# Altium PCB PCB1.PcbDoc
Units mm, origin at the board's own origin, x right, y up, seen from the top; angles counter-clockwise.
Board outline 40.01 x 73.03 mm, 4 copper layers (Top Layer, Layer 1, Layer 2, Bottom Layer), stack 0.603 mm thick; 35 components, 39 nets, 229 pads, 54 vias.
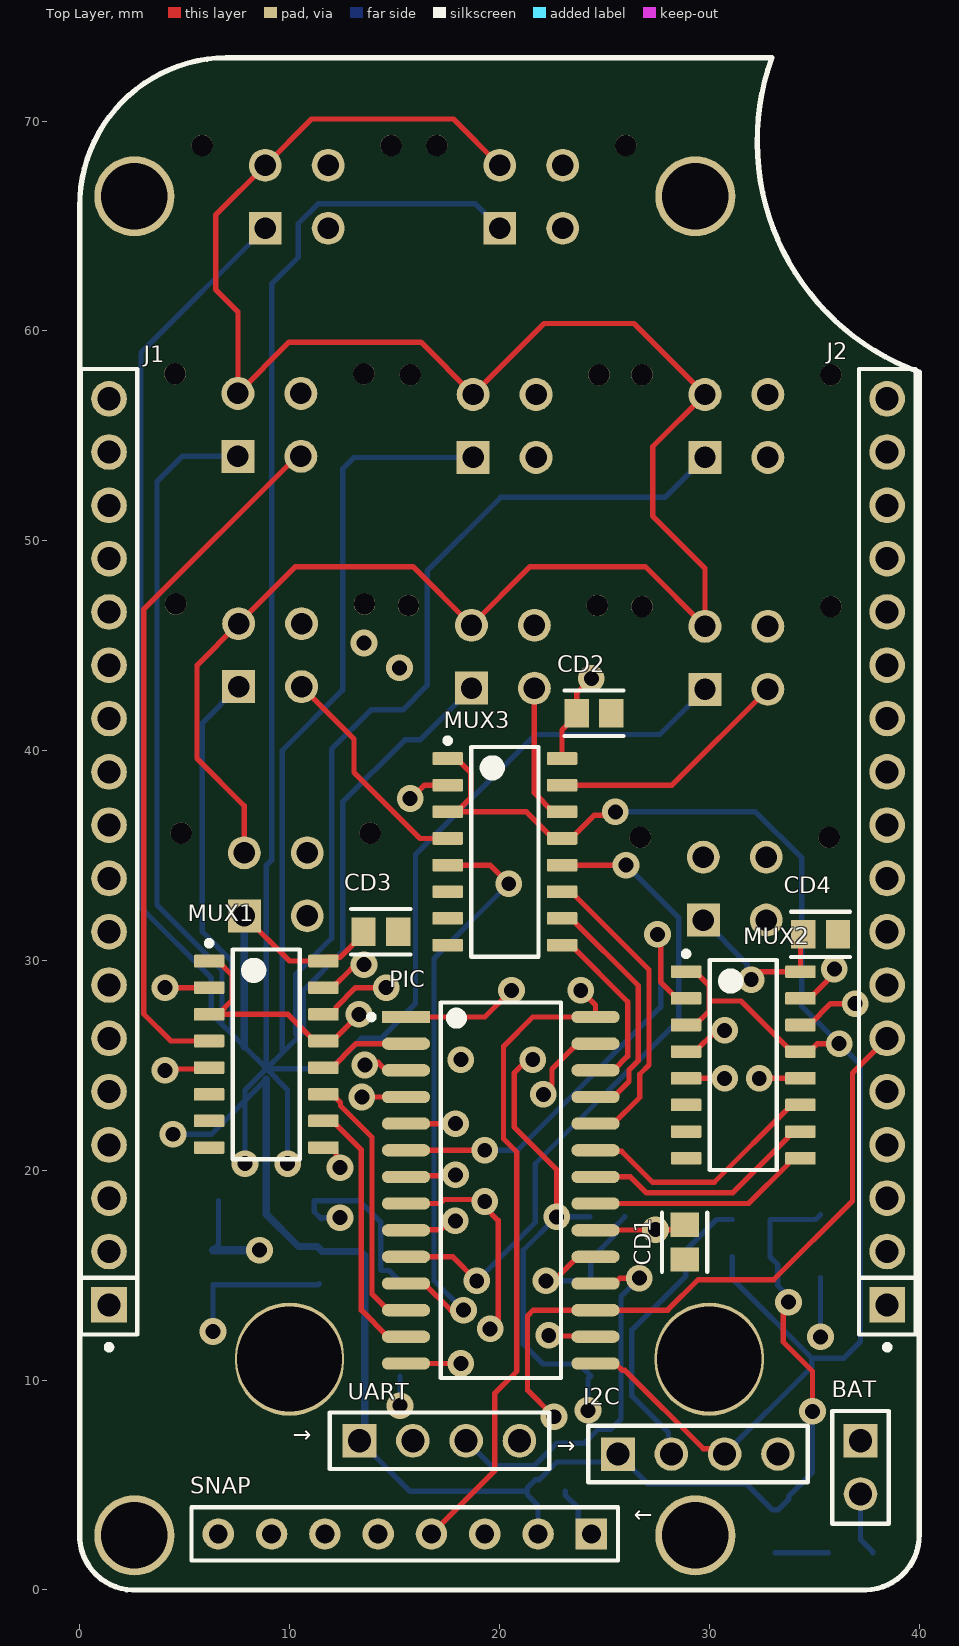
[diagram p0: Top Layer view]
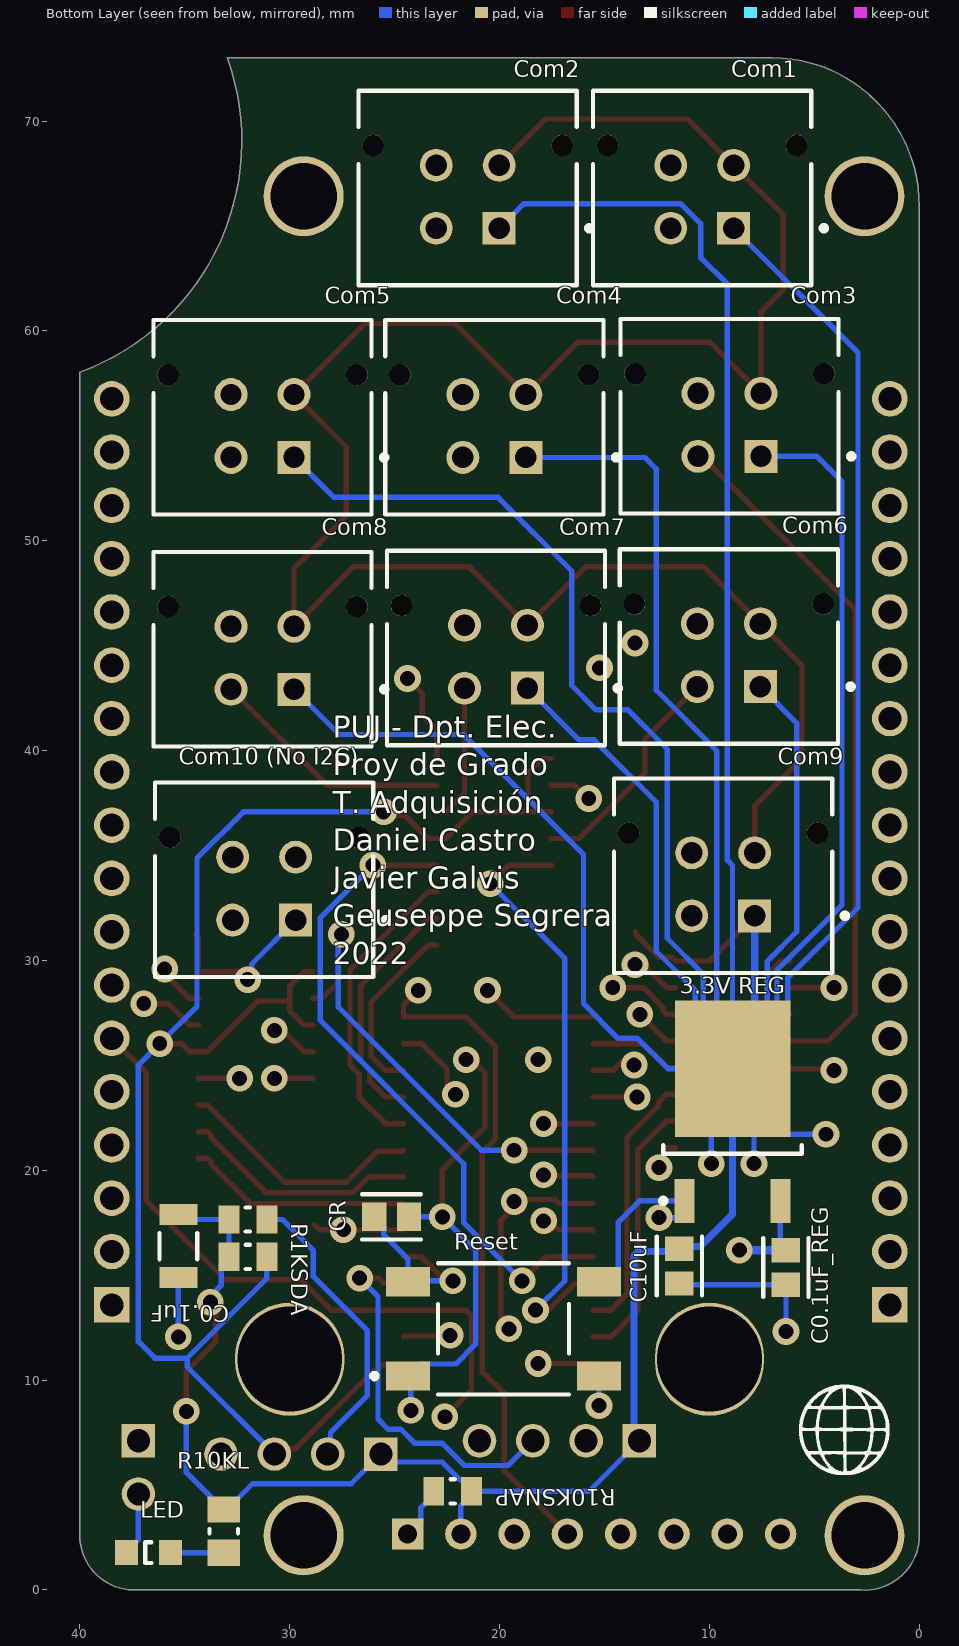
[diagram p1: Bottom Layer view, seen from below]
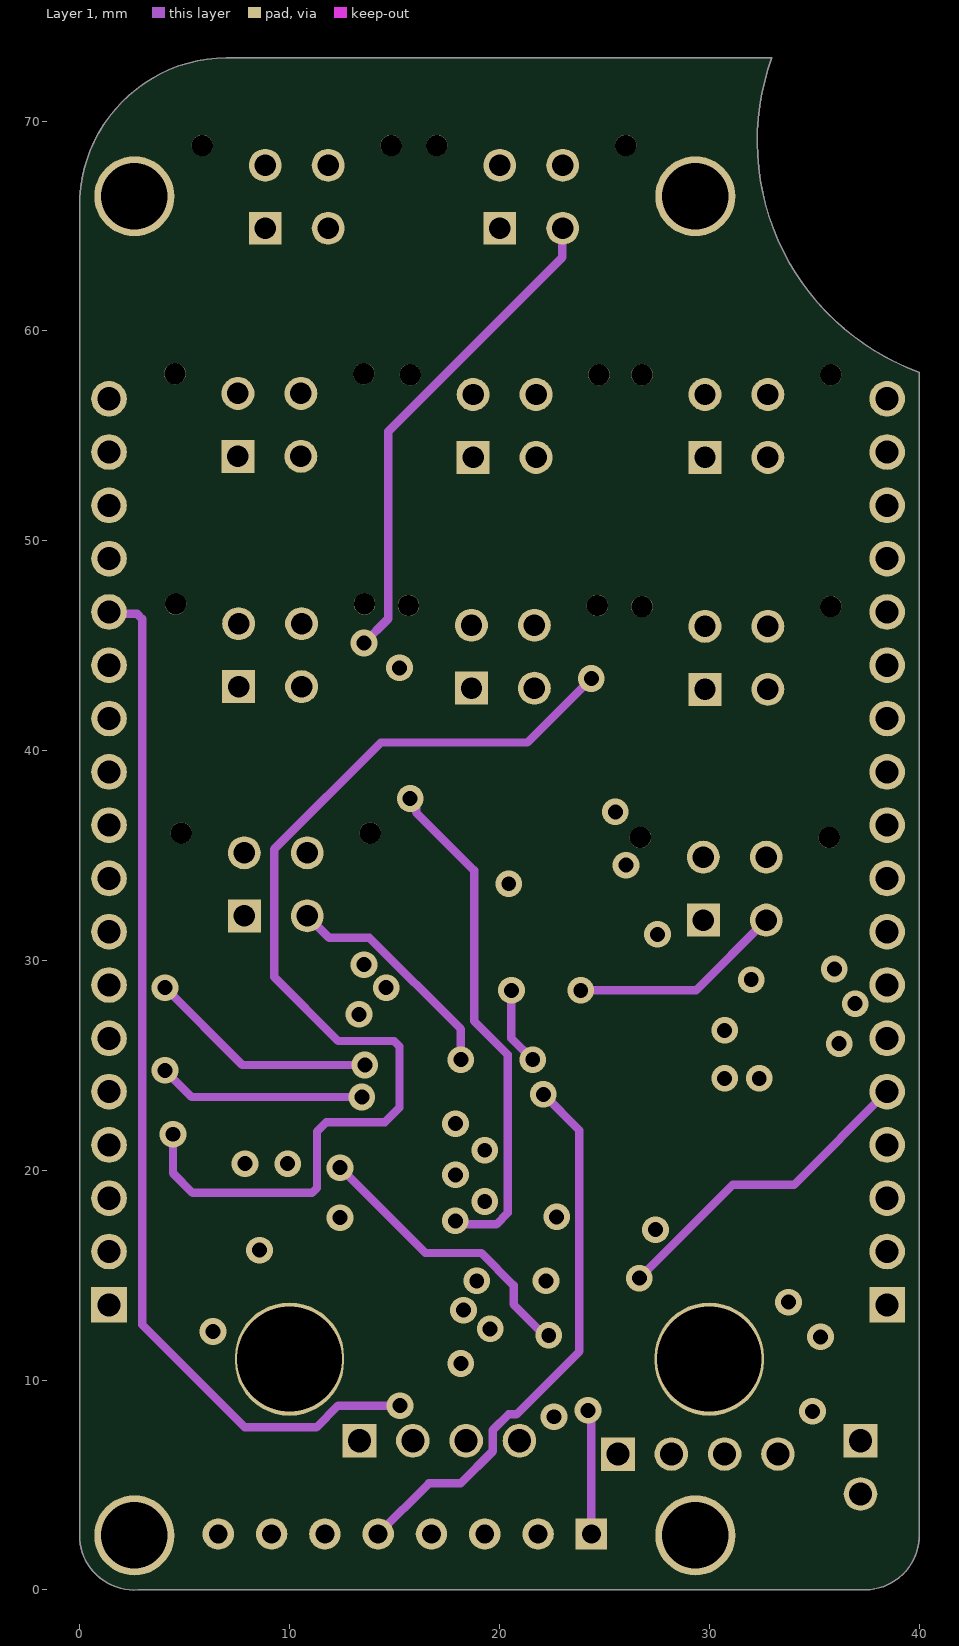
[diagram p2: Layer 1]
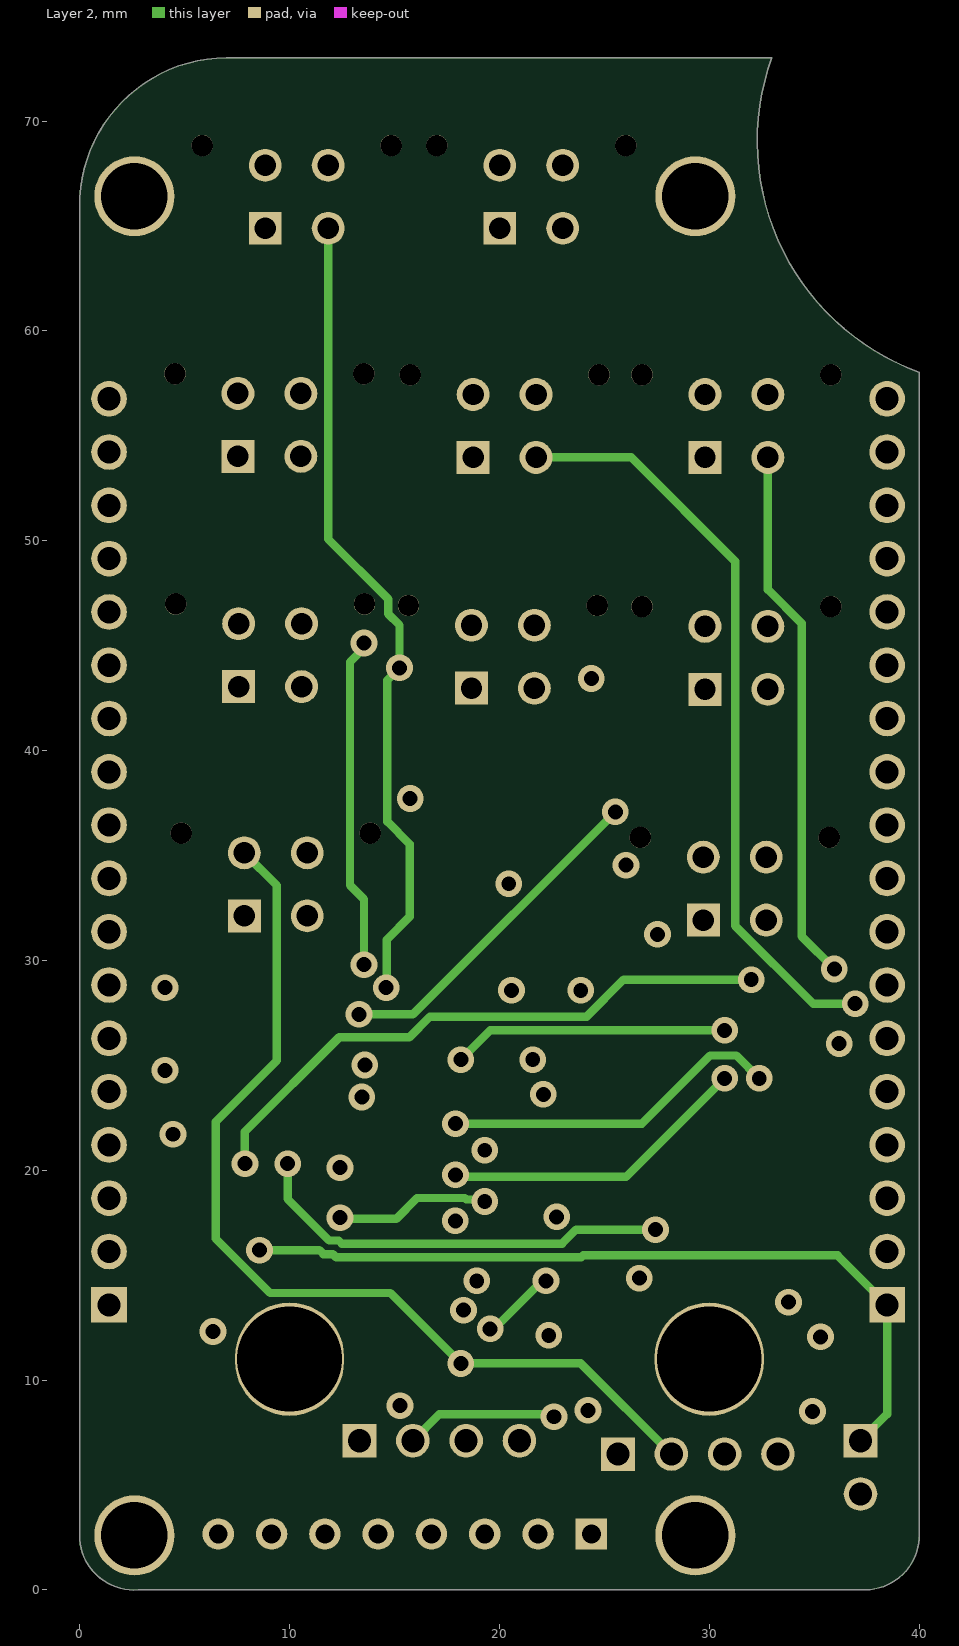
[diagram p3: Layer 2]
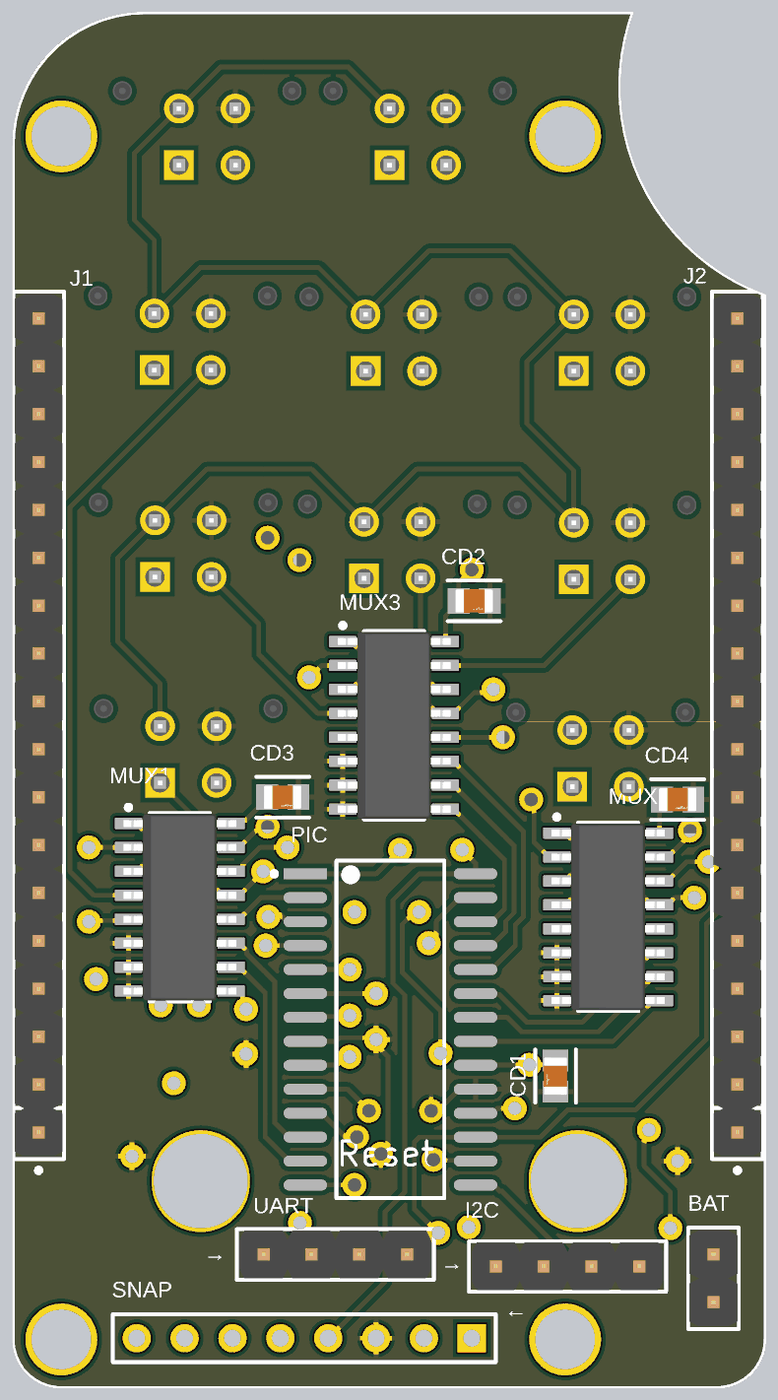
[diagram p4: 3D render of the assembled board from above, using the file's embedded part models]
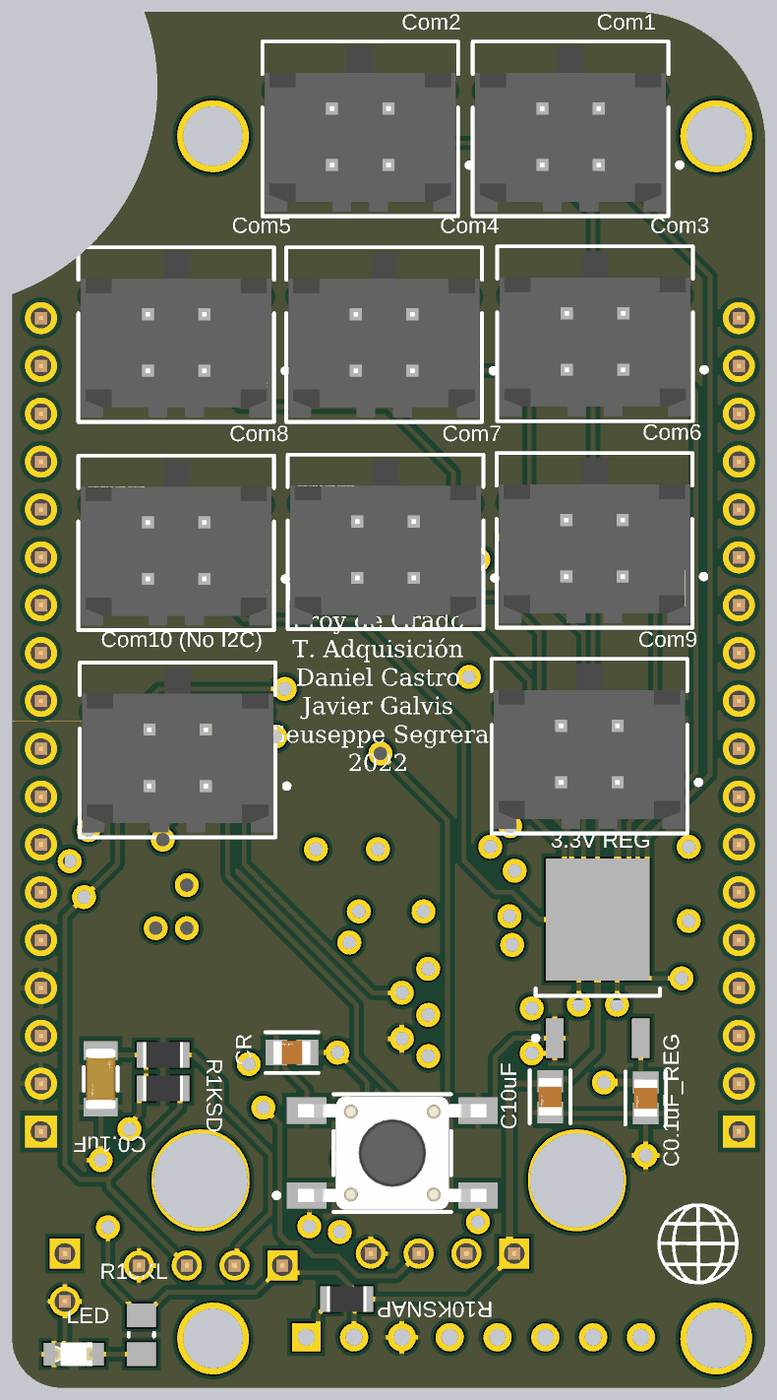
[diagram p5: 3D render of the assembled board from below, using the file's embedded part models]

## Layer stack, top to bottom
Top Solder: solder mask 0.0102, Solder Resist, Dk 3.5
Top Layer: signal copper 0.0356
Dielectric 2: prepreg 0.0711, PP-006, Dk 4.1
Layer 1: signal copper 0.035
Dielectric 1: dielectric 0.32, FR-4, Dk 4.8
Layer 2: signal copper 0.035
Dielectric 3: prepreg 0.0711, PP-006, Dk 4.1
Bottom Layer: signal copper 0.0356
Bottom Solder: solder mask 0.0102, Solder Resist, Dk 3.5

## Board outline
0,2.413 0,65.913 cw(c7.048,65.977) 6.985,73.025 32.985,73.025 ccw(c43.988,69.042) 40.005,58.039 40.005,2.667 cw(c37.401,2.603) 37.465,0 2.794,0 cw(c2.603,2.603)

## Design rules (kind name [scope] priority, off if disabled: settings)
Clearance [All] p1: gap=0.254 ignorepadtopadclearanceinfootprint=FALSE
PolygonConnect [All] p1: connectstyle=Relief reliefconductorwidth=0.254 reliefentries=4 polygonreliefangle="90 Angle" airgapwidth=0.254
RoutingVias [All] p1: holewidth=0.711 width=1.27 viastyle="Through Hole" minholewidth=0.711 minwidth=1.27 maxholewidth=0.711 maxwidth=1.27
SolderMaskExpansion [All] p1: expansion=0.102 istentingtop=FALSE
Width [All] p1: maxlimit=0.5 minlimit=0.254 preferedwidth=0.4 toplayer_maxwidth=0.4 toplayer_prefwidth=0.254 bottomlayer_maxwidth=0.4 bottomlayer_prefwidth=0.254 minimp=50.000000 maximp=50.000000 favimp=50.000000
30 further rules are at their usual default settings.

## Components (designator, comment, footprint, x,y, rotation, side; value= is the part's Value field where it differs from the comment)
"3.3V REG" "LD1117DT33TR" TO-252_N 8.896,22.792 r90 bottom
BAT "Sigma" 61300211121 37.211,5.842 r270 top
C0.1uF "Sigma 1206" FP-CC1206-1_25-MFG 35.306,16.383 r270 bottom value="100 nF"
C0.1uF_REG "Sigma 0805" FP-GRM216-0_1-IPC_B 6.35,15.367 r270 bottom
C10uF "Sigma 0805" FP-GRM216-0_1-IPC_B 11.43,15.432 r270 bottom
CD1 "Sigma 0805" FP-GRM216-0_1-IPC_B 28.829,16.572 r270 top
CD2 "Sigma 0805" FP-GRM216-0_1-IPC_B 24.511,41.783 r0 top
CD3 "Sigma 0805" FP-GRM216-0_1-IPC_B 14.351,31.369 r0 top
CD4 "Sigma 0805" FP-GRM216-0_1-IPC_B 35.306,31.242 r0 top
Com1 "" FP-43045-0427-MFG 10.342,66.809 r180 bottom
Com2 "" FP-43045-0427-MFG 21.518,66.809 r180 bottom
Com3 "" FP-43045-0427-MFG 9.041,55.938 r180 bottom
Com4 "" FP-43045-0427-MFG 20.248,55.887 r180 bottom
Com5 "" FP-43045-0427-MFG 31.297,55.887 r180 bottom
Com6 "" FP-43045-0427-MFG 9.072,44.965 r180 bottom
Com7 "" FP-43045-0427-MFG 20.169,44.889 r180 bottom
Com8 "" FP-43045-0427-MFG 31.297,44.838 r180 bottom
Com9 "" FP-43045-0427-MFG 9.343,34.043 r180 bottom
"Com10 (No I2C)" "" FP-43045-0427-MFG 31.218,33.84 r180 bottom
CR "Sigma 0805" FP-GRM216-0_1-IPC_B 25.146,17.78 r0 bottom
I2C "61300411121" 61300411121 29.464,6.477 r0 top
J1 "61301811121" FP-61301811121-MFG 1.397,35.179 r90 top
J2 "61301811121" FP-61301811121-MFG 38.481,35.179 r90 top
LED "LED Blanco Sigma 0805" 0805_A 36.737,1.778 r180 bottom
MUX1 "CD74HC4053M96" D0016A_N 8.89,25.527 r0 top
MUX2 "CD74HC4053M96" D0016A_N 31.623,25.019 r0 top
MUX3 "CD74HC4053M96" D0016A_N 20.262,35.179 r0 top
PIC "PIC18F26K40-I/SO" FP-C04-052-IPC_B 20.066,19.05 r0 top
R1KSDA "Sigma 0805" RESC2013X60X35NL10T20 31.993,15.875 r180 bottom
R10KL "Sigma 0805" RESC2013X50X30ML20T20 33.147,2.803 r270 bottom
R10KSNAP "Sigma 0805" RESC2013X60X35NL10T20 22.236,4.699 r0 bottom
Reset "TL3301AF160QG" FP-TL3301AF160QG-MFG 19.812,12.446 r180 bottom
SNAP "SNAP" HDR1X8 24.384,2.667 r180 top
UART "61300411121" 61300411121 17.145,7.112 r0 top
? "Sigma 0805" RESC2013X60X35NL10T20 31.993,17.653 r180 bottom

## Footprints (in the part's own frame and the unit in brackets; to place one, negate y for a bottom-side part, rotate by r counter-clockwise, add the part's x,y. Pads: shape width x height; smd on the part's side, far side on the other; paste and mask are expansions set on the pad)
0805_A [mm] "Chip LED, 2-Leads, Body 2.0x1.3mm, IPC Medium Density"
  rect 1.1x1.2 smd: 1(-1.05,0) 2(1.05,0)
  silkscreen extent -0.15,-0.5 0.15,0.5, body extent -1,-0.63 1,0.63, height 0.68
61300211121 [mm] "Pin Header, pitch 2.54 mm, THT, Vertical, single row, 2p"
  rect 1.6x1.6 hole 1.1: 1(-1.27,0)
  round 1.6 hole 1.1: 2(1.27,0)
  silkscreen extent -2.69,-1.35 2.69,1.35, body extent -2.54,-1.27 2.54,1.27, height 8.57
61300411121 [mm] "Pin Header, pitch 2.54 mm, THT, Vertical, single row, 4p"
  rect 1.6x1.6 hole 1.1: 1(-3.81,0)
  round 1.6 hole 1.1: 2(-1.27,0) 3(1.27,0) 4(3.81,0)
  silkscreen extent -5.23,-1.35 5.23,1.35, body extent -5.08,-1.27 5.08,1.27, height 8.57
D0016A_N [mm] "SOIC, 16-Leads, Body 10x4mm, Pitch 1.27mm, IPC Medium Density"
  rrect17% 1.45x0.6 smd: 1(-2.725,4.445) 2(-2.725,3.175) 3(-2.725,1.905) 4(-2.725,0.635) 5(-2.725,-0.635) 6(-2.725,-1.905) 7(-2.725,-3.175) 8(-2.725,-4.445) 9(2.725,-4.445) 10(2.725,-3.175) 11(2.725,-1.905) 12(2.725,-0.635) 13(2.725,0.635) 14(2.725,1.905) 15(2.725,3.175) 16(2.725,4.445)
  silkscreen extent -2.85,-5 1.6,5.42, body extent -3,-4.95 3,4.95, height 1.59
FP-43045-0427-MFG [mm]
  rect 1.57x1.57 hole 1.02 paste-1000 mask+0: 1(1.5,-1.915)
  round 1.57 hole 1.02 paste-1000 mask+0: 2(-1.5,-1.915) 3(1.5,1.085) 4(-1.5,1.085)
  round 1.02 hole 1.02 unplated paste-1000 mask+0: ""(-4.5,2.025) ""(4.5,2.025)
  silkscreen extent -5.2,-4.63 5.92,4.63, body extent -5.07,-4.39 5.07,4.39, height 10.16
FP-61301811121-MFG [mm]
  rect 1.7x1.7 hole 1.1 paste-1000 mask+0: 1(-21.59,0)
  round 1.7 hole 1.1 paste-1000 mask+0: 2(-19.05,0) 3(-16.51,0) 4(-13.97,0) 5(-11.43,0) 6(-8.89,0) 7(-6.35,0) 8(-3.81,0) 9(-1.27,0) 10(1.27,0) 11(3.81,0) 12(6.35,0) 13(8.89,0) 14(11.43,0) 15(13.97,0) 16(16.51,0) 17(19.05,0) 18(21.59,0)
  silkscreen extent -23.73,-1.35 23.01,1.35, body extent -22.86,-1.27 22.86,1.27, height 8.54
FP-C04-052-IPC_B [mm]
  rect 2.303x0.582 smd paste+0 mask+0: 1(-4.515,8.255)
  rrect100% 2.303x0.582 smd paste+0 mask+0: 2(-4.515,6.985) 3(-4.515,5.715) 4(-4.515,4.445) 5(-4.515,3.175) 6(-4.515,1.905) 7(-4.515,0.635) 8(-4.515,-0.635) 9(-4.515,-1.905) 10(-4.515,-3.175) 11(-4.515,-4.445) 12(-4.515,-5.715) 13(-4.515,-6.985) 14(-4.515,-8.255) 15(4.515,-8.255) 16(4.515,-6.985) 17(4.515,-5.715) 18(4.515,-4.445) 19(4.515,-3.175) 20(4.515,-1.905) 21(4.515,-0.635) 22(4.515,0.635) 23(4.515,1.905) 24(4.515,3.175) 25(4.515,4.445) 26(4.515,5.715) 27(4.515,6.985) 28(4.515,8.255)
  silkscreen extent -6.29,-8.95 2.86,8.95
FP-CC1206-1_25-MFG [mm]
  rect 1x1.8 smd paste+0 mask+0: 1(-1.5,0) 2(1.5,0)
  silkscreen extent -0.63,-0.9 0.63,0.9, body extent -1.6,-0.8 1.6,0.8, height 1.45
FP-GRM216-0_1-IPC_B [mm]
  rect 1.158x1.361 smd paste+0 mask+0: 1(-0.827,0) 2(0.827,0)
  silkscreen extent -1.41,-1.08 1.41,1.08, body extent -1,-0.63 1,0.63, height 0.7
FP-TL3301AF160QG-MFG [mm]
  rect 2.1x1.4 smd paste+0 mask+0: 1(-4.55,-2.25) 2(4.55,-2.25) 3(-4.55,2.25) 4(4.55,2.25)
  silkscreen extent -6.28,-3.13 3.13,3.13, body extent -5,-3 5,3, height 5.1
HDR1X8 [mm] "Connector; Header; 8 Position"
  rect 1.5x1.5 hole 0.9: 1(0,0)
  round 1.5 hole 0.9: 2(2.54,0) 3(5.08,0) 4(7.62,0) 5(10.16,0) 6(12.7,0) 7(15.24,0) 8(17.78,0)
  silkscreen extent -1.27,-1.27 19.05,1.27
RESC2013X50X30ML20T20 [mm] "Chip Resistor, 2-Leads, Body 2.00x1.25mm, IPC Low Density"
  rect 1.25x1.55 smd: 1(-1.025,0) 2(1.025,0)
  silkscreen extent -0.1,-0.67 0.1,0.67, body extent -1.1,-0.72 1.1,0.72, height 0.5
RESC2013X60X35NL10T20 [mm] "Chip Resistor, 2-Leads, Body 2.1x1.35mm, IPC Medium Density"
  rect 1x1.35 smd: 1(-0.9,0) 2(0.9,0)
  silkscreen extent -0.1,-0.58 0.1,0.58, body extent -1.05,-0.68 1.05,0.67, height 0.6
TO-252_N [mm] "D-PAK, 4-Leads, Body 6.1x6.5mm, Pitch 2.28mm, Lead Span 9.7mm, IPC Medium Density"
  rect 2.1x0.95 smd: 1(-4.25,2.28) 3(-4.25,-2.28)
  rect 6.5x5.5 smd: 4(2.05,0)
  silkscreen extent -4.37,-3.3 -1.6,3.43, body extent -2,-3.3 4.2,3.3, height 2.4

## Part data
"3.3V REG": library part CMP-0244-00088-1, "Fixed Low Drop Positive Voltage Regulator, 3.3V, 3-Pin DPAK, Tape and Reel", ComponentLink1Description="Manufacturer URL", ComponentLink1URL=http://www.st.com, ComponentLink2Description=Datasheet, ComponentLink2URL=http://www.st.com/internet/com/TECHNICAL_RESOURCES/TECHNICAL_LITERATURE/DATASHEET/CD00000544.pdf, DatasheetVersion=1/11/2011, PackageDescription="3-Pin Transistor Outline Package 2.28 mm Pitch, 9.7 mm Lead Span (DPAK)", PackageReference=TO-252, PackageVersion=2011
BAT: library part CMP-1712-00002-4, "THT Vertical Pin Header WR-PHD, Pitch 2.54 mm, Single Row, 2 pins", Contact Resistance=20mOhm, Manufacturer="Wurth Elektronik", Operating Temperature=-40to105degC, Package Reference=61300211121, Rated Current=3A, Withstanding Voltage=500VAC, Working Voltage=250VAC, Datasheet URL=https://katalog.we-online.de/em/datasheet/6130xx11121.pdf, Gender=Male, Manufacturer URL=http://www.we-online.de, Mounting Technology=THT, Orientation=Vertical, Packaging=Bag, Part Number=61300211121, Pin Number=2, Pitch=2.54mm, Publisher=WurthElektronik, Row Number=Single
C0.1uF: library part CMP-03422-001172-1, "CAP CER 0.1UF 50V X7R 1206", Capacitance="100 nF", Manufacturer=Yageo, Manufacturer Part Number=CC1206MRX7R9BB104, Package=CC1206-1.25, Temperature="-55°C to +125°C", Temperature Characteristic=X7R, Temperature Coefficient=15%, Temperature Range High=+125°C, Temperature Range Low=-55°C, TOLERANCE=0.2, Voltage Rating="50 V", Automotive=No, Automotive Grade=NA, Category=Cap, ComponentLink2Description=Datasheet, ComponentLink2URL=http://www.yageo.com/documents/recent/UPY-NP0X7R_HV_1KV-to-3KV_11.pdf, Device Class L1="Passive Components", Device Class L2=Capacitors, Device Class L3="Ceramic Capacitors", Digikey Description="CAP CER 0.1UF 50V X7R 1206", Footprint Url=http://www.yageo.com/exep/pages/download/literatures/UPY-C_GEN_24.pdf, Height=1.45mm, Lead Free=Yes, Material=Ceramic, Mouser Description="Multilayer Ceramic Capacitors MLCC - SMD/SMT 100nF 50V X7R 20%", Octopart=https://octopart.com/cc1206mrx7r9bb104-yageo-26325919, RoHS=TRUE
C0.1uF_REG C10uF CD1 CD2 CD3 CD4 CR: library part CMP-2007-00889-2, "Chip Multilayer Ceramic Capacitors for General Purpose, 0805, 3300pF, C0G, 30ppm/°C, 5%, 50V", Capacitance=3.3nF, Case Code (Imperial)=0805, Case Code (Metric)=2012, Dielectric=C0G, Dielectric Material=Ceramic, Insulation Resistance=10GR, Max Operating Temperature=125°C, Min Operating Temperature=-55°C, Package Quantity=1, Temperature Coefficient=30ppm/°C, TOLERANCE=5%, Voltage=50V, Case/Package=0805, Construction=Flat, Depth=1.25mm, Height=0.6mm, Lead Free="Lead Free", Length=2mm, Material=Ceramic, Mount="Surface Mount", Number of Pins=2, Packaging="Tape and Reel", REACH SVHC="No SVHC", RoHS Compliant=Yes, Series=GRM, Size=0.6mm, Termination=SMD/SMT, Thickness=0.028inch, Voltage Rating=50V, Voltage Rating (DC)=50V, Width=0.049inch
Com1 Com2 Com3 Com4 Com5 Com6 Com7 Com8 Com9 "Com10 (No I2C)": library part CMP-04776-000336-1, "CONN HEADER VERT 4POS 3MM", Contact Resistance=10mR, Current Rating=5A, Max Operating Temperature=105°C, Max Voltage Rating (DC)=250.25kV, Min Operating Temperature=-40°C, Package Quantity=2232, Voltage Rating=600V, Contact Material=Brass, Contact Plating=Tin, Glow Wire Compliant=Compliant, Halogen Free="Low Halogen", Housing Material=Thermoplastic, Mount="Through Hole", Number of Circuits=4, Number of Contacts=4, Number of Positions=4, Number of Rows=2, Orientation=Vertical, Packaging=Tray, Pitch=3mm, Radiation Hardening=No, REACH SVHC="No SVHC", Row Spacing=3mm, Series=43045, Termination=Solder
I2C UART: library part CMP-1502-01064-1, "THT Vertical Pin Header WR-PHD, Pitch 2.54 mm, Single Row, 4 pins", Contact Resistance=20mOhm, Manufacturer="Wurth Elektronik", Operating Temperature=-40to105degC, Rated Current=3A, Withstanding Voltage=500VAC, Working Voltage=250VAC, Datasheet URL=https://katalog.we-online.de/em/datasheet/6130xx11121.pdf, Gender=Male, Manufacturer URL=http://www.we-online.de, Mounting Technology=THT, Orientation=Vertical, Package Reference=61300411121, Packaging=Bag, Part Number=61300411121, Pin Number=4, Pitch=2.54mm, Publisher=WurthElektronik, Row Number=Single
J1 J2: library part CMP-1502-01099-2, "CONN HEADER VERT 18POS 2.54MM", Color=Black, Flammability Rating="UL94 V-0", Max Operating Temperature=105°C, Min Operating Temperature=-40°C, Voltage Rating=250V, Connector Type=Header, Contact Finish - Mating=GOLD, Contact Material="Copper Alloy", Contact Mating Length=0.236inch, Contact Plating=Gold, Contact Shape=Square, Contact Type="Male Pin", Fastening Type=Pull, Gender=Male, Insulation Color=Black, Insulation Material=Nylon, Lead Free="Lead Free", Mount="Through Hole", Number of Contacts=18, Number of Positions=18, Number of Rows=1, Packaging=Bulk, Pitch=0.1inch, RoHS Compliant=Yes, Series=WR-PHD, Termination=Solder
LED: library part CMP-1426-00010-1, "SMD mono-color Chip LED, WL-SMCW, Super Red", Color="Super Red", Manufacturer="Wuerth Elektronik", PartNumber=150080SS75000, ComponentLink1Description="Manufacturer URL", ComponentLink1URL=http://www.we-online.com, ComponentLink2Description=Datasheet, ComponentLink2URL=http://katalog.we-online.com/led/datasheet/150080SS75000.pdf, PackageReference=0805_A
MUX1 MUX2 MUX3: library part CMP-1575-00009-3, "High Speed CMOS Triple 2-Channel Analog Multiplexers/Demultiplexers, D0016A, LARGE T&R", Generic Part Number=CD74HC4053, Manufacturer="Texas Instruments", Operating Temperature Range(C)="-55 to 125", Rating=Military, Bandwidth(Max)(MHz)=200, Code_JEDEC="MS-012 variation AC", Configuration="3 X SPDT", Crosstalk=Yes, DatasheetVersion=SCHS122J, PackageReference=D0016A, PackageVersion=http://www.ti.com/lit/ml/mpds178g/mpds178g.pdf, Ron(Max)(Ohms)=130, Ron(Typ)(Ohms)=45, VCC(Max)(V)=6, VCC(Min)(V)=2
PIC: library part CMP-06276-000356-1, "IC MCU 8BIT 64KB FLASH 28SOIC", Case/Package=SOIC, Frequency=64MHz, Max Operating Temperature=85°C, Min Operating Temperature=-40°C, Core Architecture=PIC, Interface=I2C, Memory Size=64KB, Memory Type=FLASH, Mount="Surface Mount", Number of I/Os=25, Oscillator Type=Internal, Packaging=Rail/Tube, Peripherals="Brown-out Detect/Reset", RoHS Compliant=Yes, Series="PIC® XLP™ 18K"
R1KSDA R10KSNAP ?: library part CMP-1659-00013-4, "Chip Resistor, 10 KOhm, +/- 1%, 0.125 W, -55 to 155 degC, 0805 (2012 Metric), RoHS, Tape and Reel", Manufacturer=Yageo, Max Operating Temperature="155 degC", Min Operating Temperature="-55 degC", Package Quantity=5000, Voltage Rating="150 V", ComponentLink1Description="Manufacturer URL", ComponentLink1URL=http://www.yageo.com/, ComponentLink2Description=Datasheet, ComponentLink2URL=http://www.yageo.com/documents/recent/PYu-RC_Group_51_RoHS_L_04.pdf, DatasheetVersion="Rev. 4, 02/2016", Height="0.5 mm", Length="2 mm", Mount="Surface Mount", Mounting Technology="Surface Mount", PackageDescription="2-Pin Surface Mounted Device, Body 2 x 1.25 mm", PackageReference=0805, Packaging="Tape and Reel", Pins=2, REACH SVHC="No SVHC", RoHSCompliant=true
R10KL: library part CMP-2001-03796-1, Manufacturer="Vishay Dale", Part Number=CRCW0805300KFKEA
Reset: library part CMP-17879-000012-1, "SWITCH TACTILE SPST-NO 0.05A 12V", Contact Resistance=100mR, Current Rating=50mA, Insulation Resistance=100MR, Max Operating Temperature=70°C, Max Voltage Rating (DC)=50V, Min Operating Temperature=-20°C, Operating Force=160gf, Package Quantity=1000, Voltage Rating (DC)=12V, Actuator Length=1.4mm, Actuator Material=Nylon, Actuator Type=Standard, Contact Material=Silver, Contact Plating=Silver, Electrical Life=100000Cycles, Illumination Type=Non-Illuminated, Lead Free="Lead Free", Mechanical Life=100000Cycles, Mount="Surface Mount", Orientation=Straight, Packaging="Tape and Reel", REACH SVHC="No SVHC", RoHS Compliant=Yes, Series=TL3301, Switch Function=Off-Mom, Switch Travel=0.25mm, Termination="Gull Wing", Throw Configuration=SPST, Voltage Rating=50V
SNAP: library part "Header 8", "Header, 8-Pin", Supplier Part Number 1=732-5321-ND, LatestRevisionDate=17-Jul-2002, LatestRevisionNote="Re-released for DXP Platform.", Publisher="Altium Limited", Supplier 1=Digi-Key

## Free pads (board coordinates)
  round 3.81 hole 3.175: 1(2.603,2.603) 2(29.337,2.603) 3(29.337,66.421) 4(2.603,66.421)
  oval 5.2x5.4 hole 5: B(10,11) B(30,11)

## Via types
v1: diameter 1.27, hole 0.711, Top Layer to Bottom Layer, 54 vias

## Nets (pads, with @x,y where several pads share a name; then routed paths per layer and width w, separated by ;. In a path a pad name is that pad's centre, name@x,y a point inside that pad or via, vN(x,y) a via of type N, cw(c..) or ccw(c..) an arc to the next point about the centre after c; other vN are vias at no path point)
+3.3: "3.3V REG.4" "Com10 (No I2C).1" ?.1 C0.1uF.1 C10uF.1 CD1.1 CD2.1 CD3.1 CD4.1 Com1.1 Com2.1 Com3.1 Com4.1 Com5.1 Com6.1 Com7.1 Com8.1 Com9.1 I2C.1 MUX1.16 MUX2.16 MUX3.16 PIC.20 R1KSDA.1 R10KL.1 R10KSNAP.1 SNAP.2 UART.1 | length 488.3
  Top Layer w0.254: Com9.1 9.999,29.972 MUX1.16 11.788,30.145 12.401,30.145 13.524,31.268 CD3.1 ; MUX3.16 22.987,40.985 23.684,41.682 CD2.1 23.684,42.734 v1(24.384,43.434) ; PIC.20 24.594,17.158 27.428,17.158 v1(27.441,17.17) 28.6,17.17 CD1.1 ; v1(32.004,29.083) 32.385,29.464 MUX2.16 34.348,31.111 CD4.1 ; v1(33.782,13.716) 33.528,13.462 33.528,11.821 34.925,10.424 v1(34.925,8.509)
  Layer 1 w0.4: v1(4.445,21.717) 4.445,19.857 5.379,18.923 11.072,18.923 11.307,19.157 11.307,21.848 11.756,22.297 14.55,22.297 15.24,22.987 15.24,25.908 14.986,26.162 12.319,26.162 9.271,29.21 9.271,35.308 14.349,40.386 21.336,40.386 v1(24.384,43.434) ; v1@7.874,19.894 v1(7.874,20.32) ; v1@9.906,19.951 v1(9.906,20.32)
  Layer 2 w0.4: v1(7.874,20.32) 7.874,21.844 12.37,26.34 15.708,26.34 16.692,27.324 24.165,27.324 25.924,29.083 v1(32.004,29.083) ; v1(9.906,20.32) 9.906,18.635 11.885,16.656 12.336,16.656 12.49,16.502 22.989,16.502 23.657,17.17 v1(27.441,17.17)
  Bottom Layer w0.254: v1(4.445,21.717) 4.447,21.719 6.273,21.719 7.874,23.32 ; Com3.1 4.874,54.023 3.681,52.83 3.681,32.641 6.781,29.541 6.781,26.957 ; Com6.1 5.842,41.32 5.842,31.369 7.239,29.972 7.239,26.753 7.112,26.626 ; v1(7.874,20.32) 7.874,23.32 ; Com1.1 2.921,58.973 2.921,32.512 6.273,29.16 6.273,27.465 6.781,26.957 ; 8.896,24.342 7.874,23.32 ; v1(9.906,20.32) 9.906,23.832 8.896,24.842 ; UART.1 15.748,4.699 R10KSNAP.1 ; Com7.1 16.208,40.513 15.494,40.513 12.532,37.551 12.532,30.439 10.668,28.575 10.668,26.614 10.414,26.36 ; Com4.1 13.078,53.972 12.532,53.426 12.532,42.885 9.652,40.005 9.652,25.598 ; Com2.1 18.852,66.06 11.359,66.06 10.414,65.115 10.414,63.5 9.144,62.23 9.144,34.78 8.896,34.532 8.896,24.842 ; SNAP.2 21.844,4.016 21.336,4.524 R10KSNAP.1 ; 29.718,31.925 31.81,29.833 31.81,29.277 v1(32.004,29.083) ; Com8.1 27.641,40.767 21.717,40.767 16.002,35.052 16.002,27.94 14.351,26.289 13.422,26.289 11.975,24.842 8.896,24.842 ; Com5.1 27.895,52.07 20.066,52.07 16.56,48.564 16.56,43.103 15.402,41.945 13.878,41.945 12.009,40.076 12.009,31.059 10.287,29.337 10.287,26.487 10.414,26.36 ; v1(33.782,13.716) 33.782,13.991 33.266,14.507 33.266,15.502 R1KSDA.1 ?.1 35.076,17.653 C0.1uF.1 ; v1(34.925,8.509) 34.925,5.606 33.795,4.476 33.795,4.326 33.297,3.828 R10KL.1 32.997,3.828 31.76,5.065 27.066,5.065 I2C.1 25.273,6.096 22.733,6.096 21.884,5.247 21.709,5.247 21.336,4.874 R10KSNAP.1 ; 6.781,26.957 7.112,26.626 ; 7.112,26.626 7.843,25.895 8.896,24.842 ; 7.874,23.32 7.874,23.82 8.896,24.842 ; 8.896,24.842 9.652,25.598 ; 9.652,25.598 10.414,26.36
  Bottom Layer w0.35: 7.843,25.895 Com9.1 ; 8.896,24.342 8.896,17.901 10.43,16.367 11.322,16.367 C10uF.1 11.56,16.129 13.384,16.129 13.589,15.924 13.589,7.366 UART.1
GND: "3.3V REG.1" "Com10 (No I2C).4" BAT.2 C0.1uF.2 C0.1uF_REG.2 C10uF.2 CD1.2 CD2.2 CD3.2 CD4.2 Com1.4 Com2.4 Com3.4 Com4.4 Com5.4 Com6.4 Com7.4 Com8.4 Com9.4 CR.2 I2C.4 J2.2 J2.4 LED.1 MUX1.6 MUX1.7 MUX1.8 MUX2.6 MUX2.7 MUX2.8 MUX3.6 MUX3.7 MUX3.8 PIC.8 PIC.19 Reset.3 Reset.4 SNAP.3 UART.4 | length 52.2
  Top Layer w0.254: PIC.8 17.167,18.415 17.359,18.607 19.211,18.607 v1(19.304,18.513) ; v1@19.304,18.415 19.304,18.248 19.939,17.613 19.939,12.827 v1(19.558,12.446) ; v1(22.225,14.732) 22.578,14.732 23.721,15.875 PIC.19
  Layer 2 w0.4: v1(12.404,17.743) 12.459,17.688 15.084,17.688 16.075,18.68 18.353,18.68 18.424,18.608 19.209,18.608 v1(19.304,18.513) ; v1(19.558,12.446) 19.748,12.446 22.034,14.732 v1(22.225,14.732)
  Bottom Layer w0.254: v1(6.35,12.319) C0.1uF_REG.2 11.365,14.54 C10uF.2 ; v1(12.404,17.743) 11.524,17.743 11.524,17.677 11.176,18.025 11.176,18.542 13.335,18.542 14.339,17.538 14.339,15.269 14.382,15.226 14.732,15.226 Reset.4 ; v1(22.225,14.732) 24.326,14.732 Reset.3 24.362,15.777 25.521,16.936 25.521,17.328 CR.2 ; v1(35.306,12.065) C0.1uF.2 ; BAT.2 37.211,2.404 37.787,1.828 LED.1
"Net3.3V REG_3": "3.3V REG.3" BAT.1 C0.1uF_REG.1 J2.1 | length 42.8
  Layer 2 w0.4: v1(8.571,16.194) 11.422,16.194 11.614,16.002 12.065,16.002 12.219,15.848 23.895,15.848 23.995,15.948 36.122,15.948 J2.1 38.481,8.382 BAT.1
  Bottom Layer w0.254: C0.1uF_REG.1 6.616,16.46 6.616,18.542
  Bottom Layer w0.4: C0.1uF_REG.1 v1(8.571,16.194)
Net_2: ?.2 Com1.3 Com2.3 Com3.3 Com4.3 Com5.3 Com6.3 Com7.3 Com8.3 Com9.3 I2C.2 PIC.14 | length 168.2
  Top Layer w0.254: Com9.3 7.843,37.369 5.588,39.624 5.588,44.066 Com6.3 10.29,48.768 15.875,48.768 Com7.3 21.463,48.768 26.952,48.768 Com8.3 29.797,48.689 27.305,51.181 27.305,54.48 Com5.3 26.416,60.353 22.129,60.353 Com4.3 16.256,59.464 9.982,59.464 Com3.3 7.541,60.912 6.477,61.976 6.477,65.529 Com1.3 11.052,70.104 17.808,70.104 Com2.3 ; PIC.14 v1(18.161,10.795)
  Layer 2 w0.4: Com9.3 9.398,33.573 9.398,25.232 6.477,22.311 6.477,16.748 9.071,14.154 14.802,14.154 v1(18.161,10.795) 23.876,10.795 I2C.2
  Bottom Layer w0.254: I2C.2 28.057,6.614 28.057,7.503 26.301,9.259 26.301,12.373 28.874,14.946 28.874,16.174 30.353,17.653 ?.2
NetCom1_2: Com1.2 MUX1.14 | length 42.4
  Top Layer w0.254: MUX1.14 12.04,27.432 12.213,27.605 12.213,27.766 13.149,28.702 v1(14.605,28.702)
  Layer 2 w0.4: Com1.2 11.842,50.083 14.705,47.22 14.705,46.515 15.24,45.98 v1(15.24,43.942) 14.659,43.361 14.659,36.615 15.726,35.548 15.726,32.082 14.637,30.993 14.637,28.734 v1(14.605,28.702)
NetCom2_2: Com2.2 MUX1.15 | length 42
  Top Layer w0.254: MUX1.15 12.04,28.702 12.943,29.605 13.353,29.605 v1(13.548,29.8)
  Layer 1 w0.4: v1(13.548,45.126) 14.705,46.283 14.705,55.218 22.996,63.509 22.996,64.872 Com2.2
  Layer 2 w0.4: v1(13.548,29.8) 13.548,32.917 12.879,33.586 12.879,44.222 13.548,44.891 v1(13.548,45.126)
NetCom3_2: Com3.2 MUX1.4 | length 33.4
  Top Layer w0.254: MUX1.4 4.346,26.162 3.048,27.46 3.048,46.726 10.345,54.023 Com3.2
NetCom4_2: Com4.2 MUX2.14 | length 39.2
  Top Layer w0.254: MUX2.14 34.773,26.924 35.789,27.94 v1(36.957,27.94)
  Layer 2 w0.4: Com4.2 26.292,53.972 31.242,49.022 31.242,31.649 34.951,27.94 v1(36.957,27.94)
NetCom5_2: Com5.2 MUX2.15 | length 28
  Top Layer w0.254: MUX2.15 34.773,28.194 35.962,29.383 v1(35.962,29.591)
  Layer 2 w0.4: Com5.2 32.797,47.675 34.408,46.064 34.408,31.145 v1(35.962,29.591)
NetCom6_2: Com6.2 MUX3.4 | length 10.9
  Top Layer w0.254: Com6.2 13.075,40.547 13.075,38.955 16.216,35.814 MUX3.4
NetCom7_2: Com7.2 MUX3.14 | length 6.7
  Top Layer w0.254: Com7.2 21.669,37.977 22.562,37.084 MUX3.14
NetCom8_2: Com8.2 MUX3.15 | length 11.7
  Top Layer w0.254: MUX3.15 28.228,38.354 Com8.2
NetCom9_2: Com9.2 MUX2.4 | length 26.4
  Top Layer w0.254: MUX2.4 29.323,25.654 30.339,26.67 v1(30.734,26.67)
  Layer 1 w0.4: Com9.2 11.894,31.077 13.81,31.077 18.161,26.727 v1(18.161,25.273)
  Layer 2 w0.4: v1(18.161,25.273) 19.558,26.67 v1(30.734,26.67)
"NetCom10 (No I2C)_2": "Com10 (No I2C).2" PIC.28 SNAP.4 | length 41.9
  Top Layer w0.254: SNAP.4 19.774,5.677 19.774,9.36 20.828,10.414 20.828,20.868 20.193,21.503 20.193,25.908 21.59,27.305 PIC.28 24.581,27.87 v1(23.876,28.575)
  Layer 1 w0.4: v1(23.876,28.575) 29.368,28.575 32.718,31.925
NetCR_1: CR.1 PIC.1 R10KSNAP.2 Reset.1 SNAP.1 | length 40.5
  Top Layer w0.254: PIC.1 19.304,27.305 v1(20.574,28.575) ; v1(21.59,25.273) 21.336,25.273 20.701,24.638 20.701,22.062 22.727,20.036 v1(22.727,17.78)
  Layer 1 w0.4: v1(20.574,28.575) 20.574,26.289 v1(21.59,25.273) ; v1(24.225,8.558) 24.384,8.4 SNAP.1
  Bottom Layer w0.254: R10KSNAP.2 23.136,4.524 23.761,3.899 23.761,3.29 SNAP.1 ; v1(24.225,8.558) 24.225,10.059 Reset.1 23.789,10.769 22.084,10.769 21.137,11.716 21.137,16.191 v1(22.727,17.78) CR.1
NetI2C_3: I2C.3 MUX1.1 MUX1.3 MUX1.13 MUX2.1 MUX2.3 MUX2.13 MUX3.1 MUX3.3 MUX3.13 PIC.15 R1KSDA.2 | length 109.4
  Top Layer w0.254: MUX1.3 MUX1.3@6.59,27.432 ; MUX1.1 6.59,29.972 7.271,29.291 7.271,28.113 MUX1.3@6.59,27.432 ; v1@13.316,27.432 v1(13.313,27.429) 13.307,27.429 12.04,26.162 MUX1.13 11.19,26.162 9.92,27.432 MUX1.3@6.59,27.432 ; MUX3.3 MUX3.3@17.962,37.084 ; MUX3.1 17.962,39.624 18.643,38.943 18.643,37.765 MUX3.3@17.962,37.084 ; PIC.15@25.181,10.732 25.593,10.732 25.847,10.478 25.972,10.478 29.716,6.735 30.476,6.735 I2C.3 ; v1(25.527,37.084) 25.356,36.913 24.511,36.913 23.412,35.814 MUX3.13 22.562,35.814 21.292,37.084 MUX3.3@17.962,37.084 ; MUX2.1 29.323,29.464 30.004,28.783 30.004,27.766 ; MUX2.3@29.484,27.097 29.311,26.924 MUX2.3 29.323,26.924 30.004,27.605 30.004,27.766 ; v1(36.195,26.035) 35.154,26.035 34.773,25.654 MUX2.13 33.923,25.654 31.51,28.067 30.041,28.067 30.004,28.03 30.004,27.766
  Layer 2 w0.4: v1(13.313,27.429) 15.872,27.429 v1(25.527,37.084)
  Bottom Layer w0.254: v1(25.527,37.084) 32.208,37.084 34.417,34.875 34.417,27.813 v1(36.195,26.035) 37.211,25.019 37.211,11.833 36.427,11.049 34.885,11.049 ; I2C.3 34.885,10.628 34.885,11.049 ; R1KSDA.2 31.093,14.841 34.885,11.049
NetJ1_14: J1.14 Reset.2 | length 51.5
  Layer 1 w0.4: J1.14 1.49,46.516 2.741,46.516 2.975,46.282 2.975,12.646 7.874,7.747 11.281,7.747 12.319,8.785 v1(15.262,8.785)
  Bottom Layer w0.254: v1(15.262,8.785) Reset.2
NetJ2_5: J2.5 PIC.18 UART.3 | length 34.1
  Top Layer w0.254: PIC.18 25.488,14.605 25.742,14.859 v1(26.67,14.859)
  Layer 1 w0.4: v1(26.67,14.859) 31.118,19.307 34.039,19.307 J2.5
  Bottom Layer w0.254: UART.3@18.709,7.112 UART.3 19.596,5.931 21.675,5.931 22.729,6.985 24.023,6.985 24.696,7.658 25.311,7.658 25.793,8.14 25.793,13.982 v1(26.67,14.859) v1@26.456,14.859
NetJ2_6: J2.6 PIC.17 UART.2 | length 38.8
  Top Layer w0.254: v1(22.606,8.255) 21.336,9.525 21.336,13.059 21.612,13.335 PIC.17 28.019,13.335 29.469,14.785 33.073,14.785 36.83,18.542 36.83,24.638 J2.6
  Layer 2 w0.4: UART.2 17.129,8.366 22.495,8.366 v1(22.606,8.255)
NetLED_2: LED.2 R10KL.2 | length 2.5
  Bottom Layer w0.254: R10KL.2 LED.2
NetMUX1_2: MUX1.2 PIC.3 | length 15.3
  Top Layer w0.254: v1(4.064,28.702) MUX1.2 ; v1(13.589,25.019) 13.716,25.146 14.22,25.146 14.601,24.765 PIC.3
  Layer 1 w0.4: v1(4.064,28.702) 7.747,25.019 v1(13.589,25.019)
NetMUX1_5: MUX1.5 PIC.4 | length 14.2
  Top Layer w0.254: v1(4.064,24.765) 4.127,24.828 6.101,24.828 MUX1.5 ; v1(13.446,23.495) PIC.4
  Layer 1 w0.4: v1(4.064,24.765) 5.334,23.495 v1(13.446,23.495)
NetMUX1_9: MUX1.9 PIC.16 | length 17.8
  Top Layer w0.254: MUX1.9 12.04,21.082 12.213,20.909 12.213,20.315 v1(12.404,20.124) v1@12.573,19.955 ; v1(22.352,12.137) 22.388,12.101 24.546,12.101 PIC.16
  Layer 1 w0.4: v1(12.404,20.124) 16.472,16.056 19.139,16.056 20.681,14.515 20.681,13.609 22.153,12.137 v1(22.352,12.137)
NetMUX1_10: MUX1.10 PIC.13 | length 12.7
  Top Layer w0.254: MUX1.10 12.04,22.352 13.42,20.972 13.42,13.335 14.69,12.065 PIC.13
NetMUX1_11: MUX1.11 PIC.12 | length 12.7
  Top Layer w0.254: MUX1.11 12.04,23.622 12.43,23.232 12.43,23.074 13.928,21.576 13.928,14.097 14.69,13.335 PIC.12
NetMUX1_12: MUX1.12 PIC.2 | length 4.4
  Top Layer w0.254: MUX1.12 12.04,24.892 12.573,25.425 12.573,25.44 13.168,26.035 PIC.2
NetMUX2_2: MUX2.2 PIC.6 | length 22.4
  Top Layer w0.254: PIC.6 v1(19.304,20.955) ; v1(27.536,31.242) 27.686,31.092 27.686,28.981 28.473,28.194 MUX2.2
  Bottom Layer w0.254: v1(19.304,20.955) 20.868,20.955 27.686,27.773 27.686,31.092 v1(27.536,31.242)
NetMUX2_5: MUX2.5 PIC.7 | length 19
  Top Layer w0.254: PIC.7 15.598,19.733 17.859,19.733 v1(17.907,19.78) ; MUX2.5 v1(30.734,24.384)
  Layer 2 w0.4: v1(17.907,19.78) 18.002,19.685 26.035,19.685 v1(30.734,24.384)
NetMUX2_9: MUX2.9 PIC.21 | length 10.7
  Top Layer w0.254: PIC.21 31.877,18.415 33.75,20.288 33.75,20.401 33.923,20.574 MUX2.9
NetMUX2_10: MUX2.10 PIC.22 | length 11.4
  Top Layer w0.254: PIC.22 26.249,19.685 27.011,18.923 31.115,18.923 33.75,21.558 33.75,21.671 33.923,21.844 MUX2.10
NetMUX2_11: MUX2.11 PIC.23 | length 11.9
  Top Layer w0.254: PIC.23 24.633,20.903 25.833,20.903 27.305,19.431 30.24,19.431 33.923,23.114 MUX2.11
NetMUX2_12: MUX2.12 PIC.5 | length 20.6
  Top Layer w0.254: PIC.5 v1(17.907,22.225) ; v1(32.385,24.384) MUX2.12
  Layer 2 w0.4: v1(17.907,22.225) 26.797,22.225 30.045,25.473 31.296,25.473 v1(32.385,24.384)
NetMUX3_2: MUX3.2 PIC.9 | length 29.1
  Top Layer w0.254: PIC.9 15.574,17.169 17.21,17.169 17.632,17.591 v1(17.901,17.591) ; v1(15.748,37.719) 15.796,37.719 16.431,38.354 MUX3.2
  Layer 1 w0.4: v1(15.748,37.719) 15.748,37.484 16.031,37.201 16.031,37.055 18.796,34.29 18.796,27.116 20.393,25.519 20.393,17.964 19.854,17.424 18.068,17.424 v1(17.901,17.591)
NetMUX3_5: MUX3.5 PIC.11 | length 28.9
  Top Layer w0.254: PIC.11 16.411,14.605 17.681,13.335 v1(18.288,13.335) ; MUX3.5 19.558,34.544 v1(20.447,33.655)
  Bottom Layer w0.254: v1(18.288,13.335) 16.885,14.738 16.885,30.093 v1(20.447,33.655)
NetMUX3_9: MUX3.9 PIC.26 | length 8.7
  Top Layer w0.254: MUX3.9 23.412,30.734 26.114,28.032 26.114,25.437 25.442,24.765 PIC.26
NetMUX3_10: MUX3.10 PIC.25 | length 11.6
  Top Layer w0.254: MUX3.10 23.412,32.004 26.622,28.794 26.622,25.227 26.181,24.786 26.181,24.234 25.442,23.495 PIC.25
NetMUX3_11: MUX3.11 PIC.24 | length 14.6
  Top Layer w0.254: MUX3.11 23.412,33.274 27.13,29.556 27.13,25.016 26.689,24.575 26.689,23.472 25.442,22.225 PIC.24
NetMUX3_12: MUX3.12 PIC.10 | length 31.7
  Top Layer w0.254: PIC.10 17.78,15.875 v1(18.923,14.732) ; MUX3.12 v1(26.035,34.544)
  Bottom Layer w0.254: v1(18.923,14.732) 21.711,17.52 21.711,20.314 28.552,27.155 28.552,32.027 v1(26.035,34.544)
NetPIC_27: PIC.27 SNAP.5 | length 30.7
  Top Layer w0.254: v1(22.098,23.622) 22.098,23.648 22.508,24.058 22.508,24.822 23.721,26.035 PIC.27
  Layer 1 w0.4: SNAP.5 16.637,5.08 18.156,5.08 19.685,6.609 19.685,7.615 20.436,8.366 20.812,8.366 23.816,11.37 23.816,21.904 v1(22.098,23.622)
pads on no net: "Com10 (No I2C).3" "Com10 (No I2C)." Com1. Com2. Com3. Com4. Com5. Com6. Com7. Com8. Com9. J1.1 J1.2 J1.3 J1.4 J1.5 J1.6 J1.7 J1.8 J1.9 J1.10 J1.11 J1.12 J1.13 J1.15 J1.16 J1.17 J1.18 J2.3 J2.7 J2.8 J2.9 J2.10 J2.11 J2.12 J2.13 J2.14 J2.15 J2.16 J2.17 J2.18 SNAP.6 SNAP.7 SNAP.8

## Polygon pours and split planes (outlines as drawn)
GND on Top Layer "NONET_L01_P004" (solid, shelved, pour order 4): 0,2.413 0,65.913 cw(c7.048,65.977) 6.985,73.025 32.985,73.025 ccw(c43.988,69.042) 40.005,58.039 40.005,2.667 cw(c37.401,2.603) 37.465,0 2.794,0 cw(c2.603,2.603)
GND on Layer 1 "NONET_L02_P005" (solid, shelved, pour order 5): 0,2.413 0,65.913 cw(c7.048,65.977) 6.985,73.025 32.985,73.025 ccw(c43.988,69.042) 40.005,58.039 40.005,2.667 cw(c37.401,2.603) 37.465,0 2.794,0 cw(c2.603,2.603)
GND on Bottom Layer "NONET_L04_P007" (solid, shelved, pour order 7): 0,2.413 0,65.913 cw(c7.048,65.977) 6.985,73.025 32.985,73.025 ccw(c43.988,69.042) 40.005,58.039 40.005,2.667 cw(c37.401,2.603) 37.465,0 2.794,0 cw(c2.603,2.603)
GND on Layer 2 "NONET_L03_P006" (solid, shelved, pour order 6): 0,2.413 0,65.913 cw(c7.048,65.977) 6.985,73.025 32.985,73.025 ccw(c43.988,69.042) 40.005,58.039 40.005,2.667 cw(c37.401,2.603) 37.465,0 2.794,0 cw(c2.603,2.603)

## Silkscreen, mask and mechanical layers (free items; w line width, h text height)
Top Overlay:
  lines w0.254: 0,2.413 ccw(c2.603,2.603) 2.794,0 37.465,0 ccw(c37.401,2.603) 40.005,2.667 40.005,58.039 cw(c43.988,69.042) 32.985,73.025 6.985,73.025 ccw(c7.048,65.977) 0,65.913 0,58.039 0,2.413
  text "→" at 10.16,6.766 h1.34
  text "→" at 22.733,6.258 h1.34
  text "→" at 27.305,4.156 h1.34 r180
Bottom Overlay:
  region: 1937 vertices and 16 holes, not listed, extent 1.423,5.484 5.715,9.776
  text "PUJ - Dpt. Elec. / Proy de Grado / T. Adquisición / Daniel Castro / Javier Galvis / Geuseppe Segrera / 2022" at 27.938,29.464 h1.8